# Altium PCB MotherBoard.PcbDoc
Units mm, origin at the board's own origin, x right, y up, seen from the top; angles counter-clockwise.
Board outline 127 x 101.6 mm, 2 copper layers (Top Layer, Bottom Layer); 102 components, 87 nets, 443 pads, 116 vias.
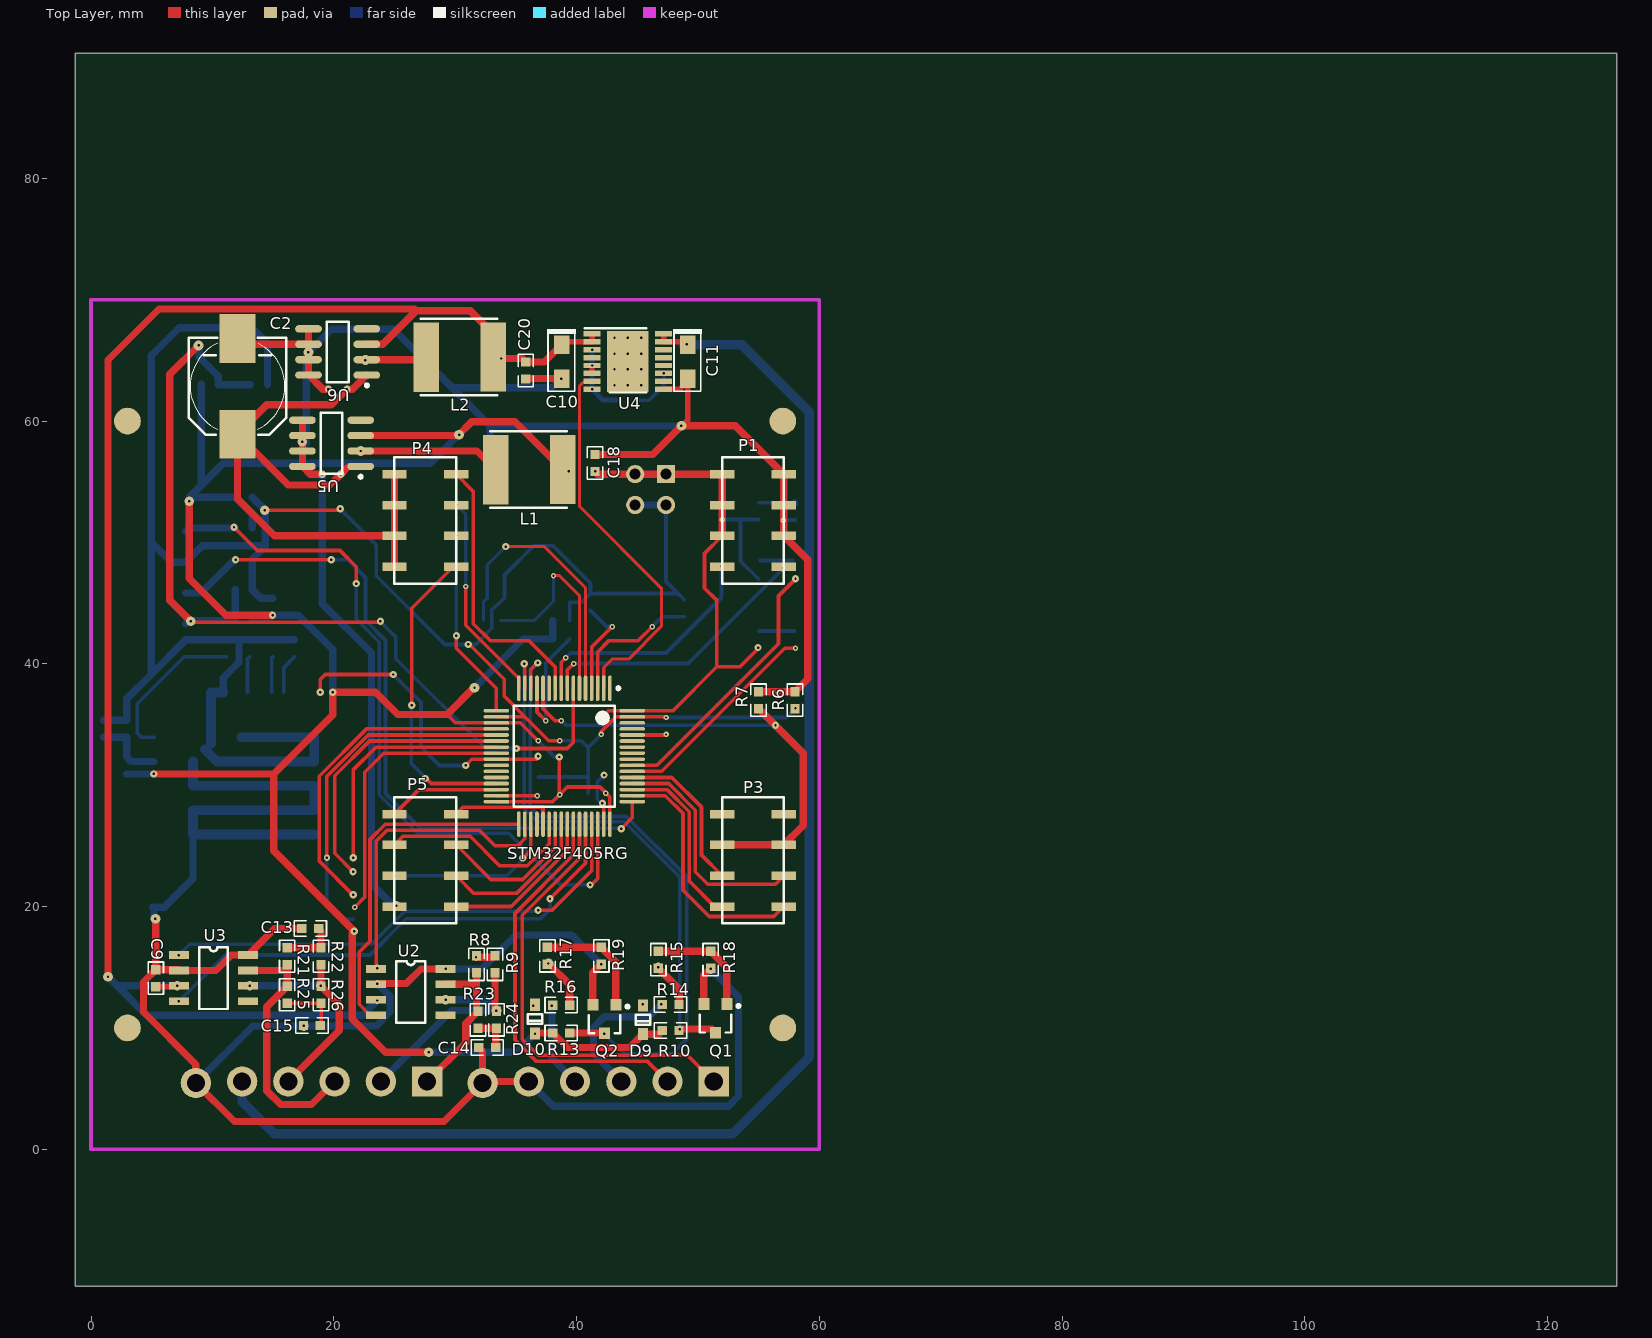
[diagram p0: Top Layer view]
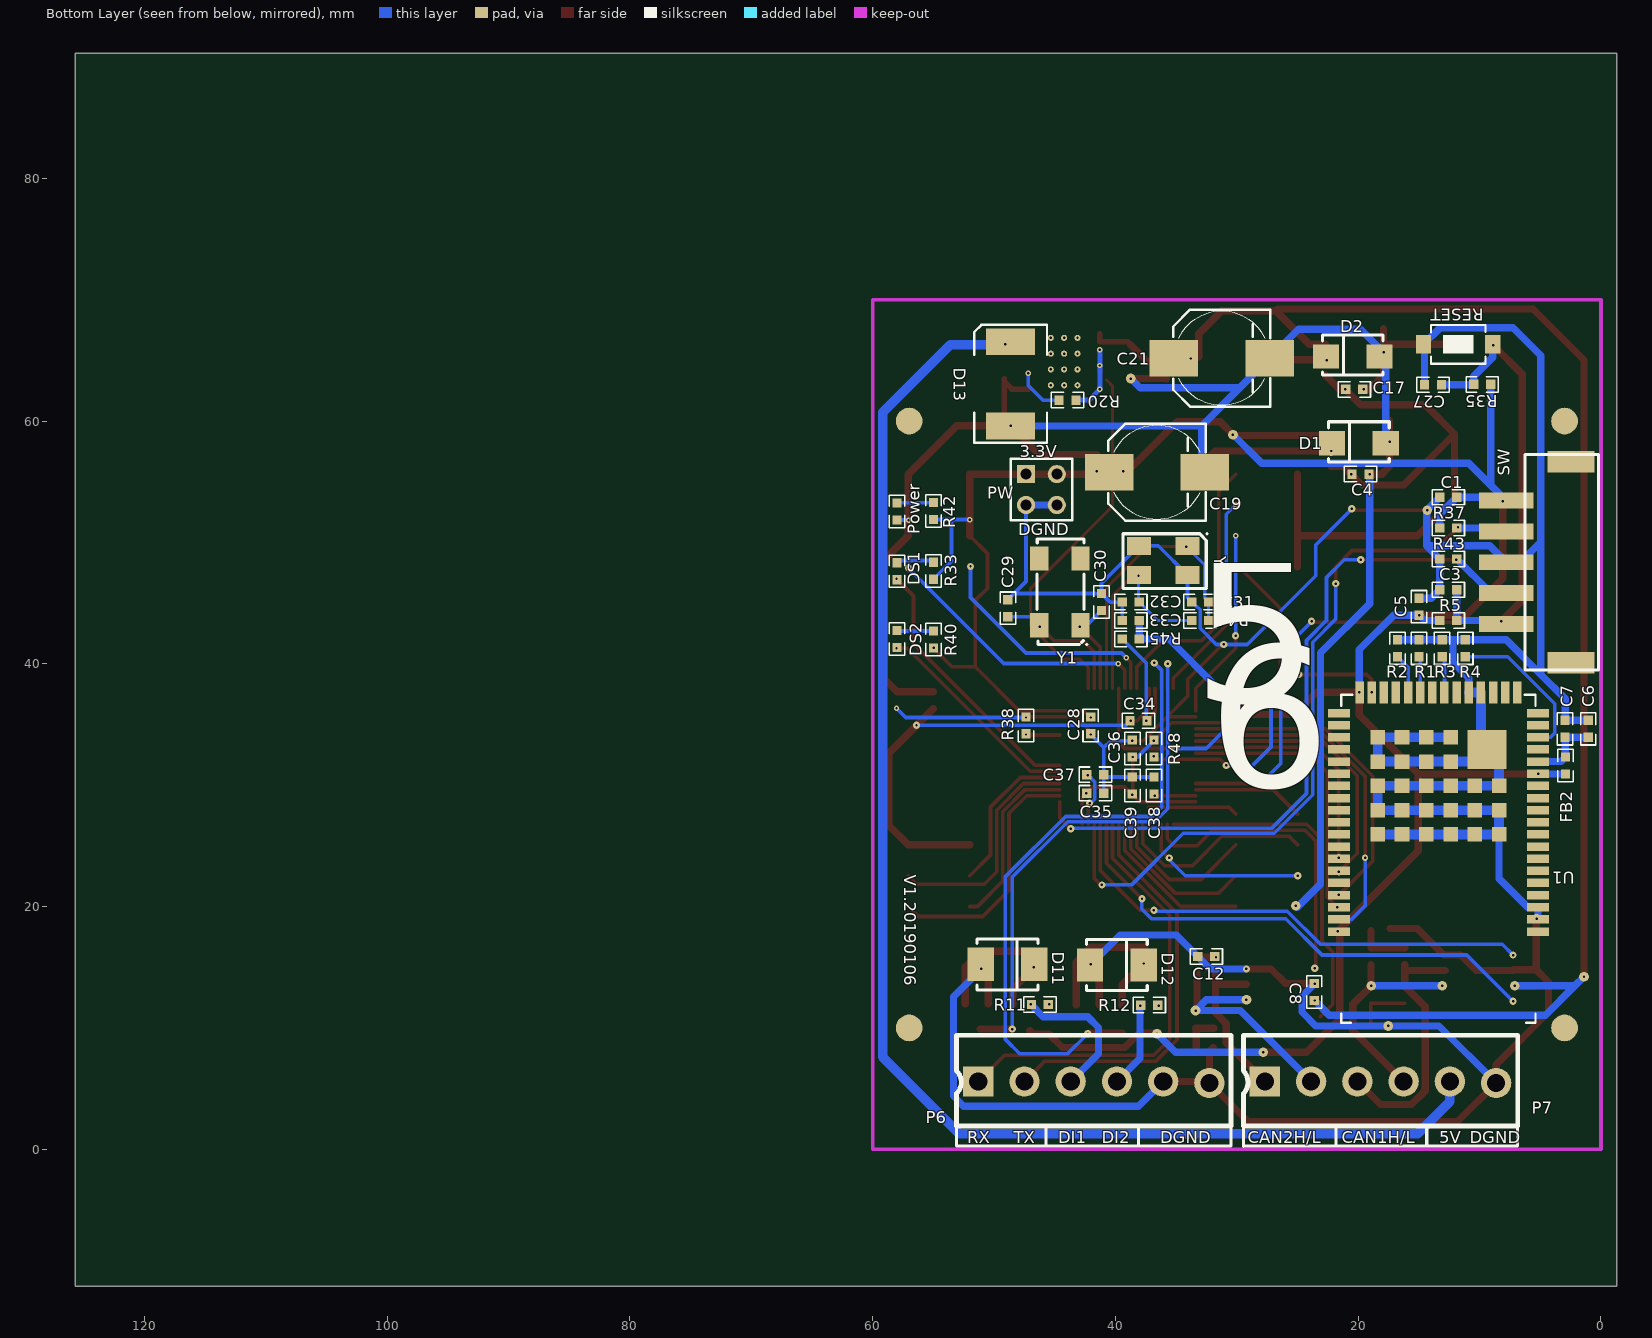
[diagram p1: Bottom Layer view, seen from below]
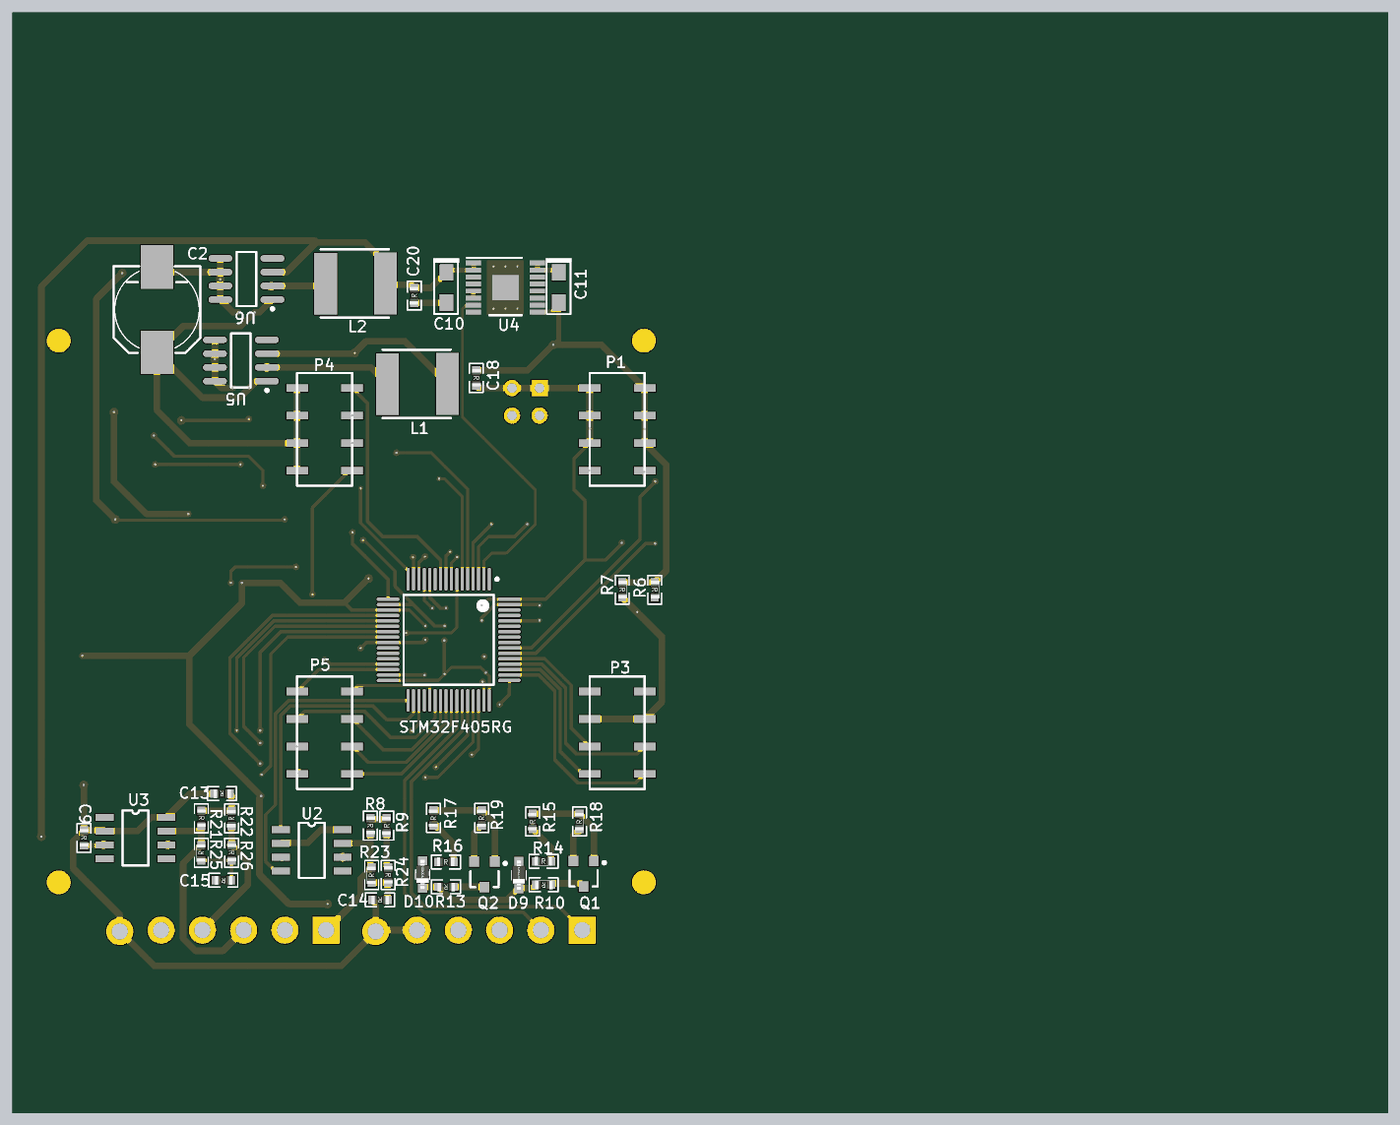
[diagram p2: 3D render of the assembled board from above, using the file's embedded part models]
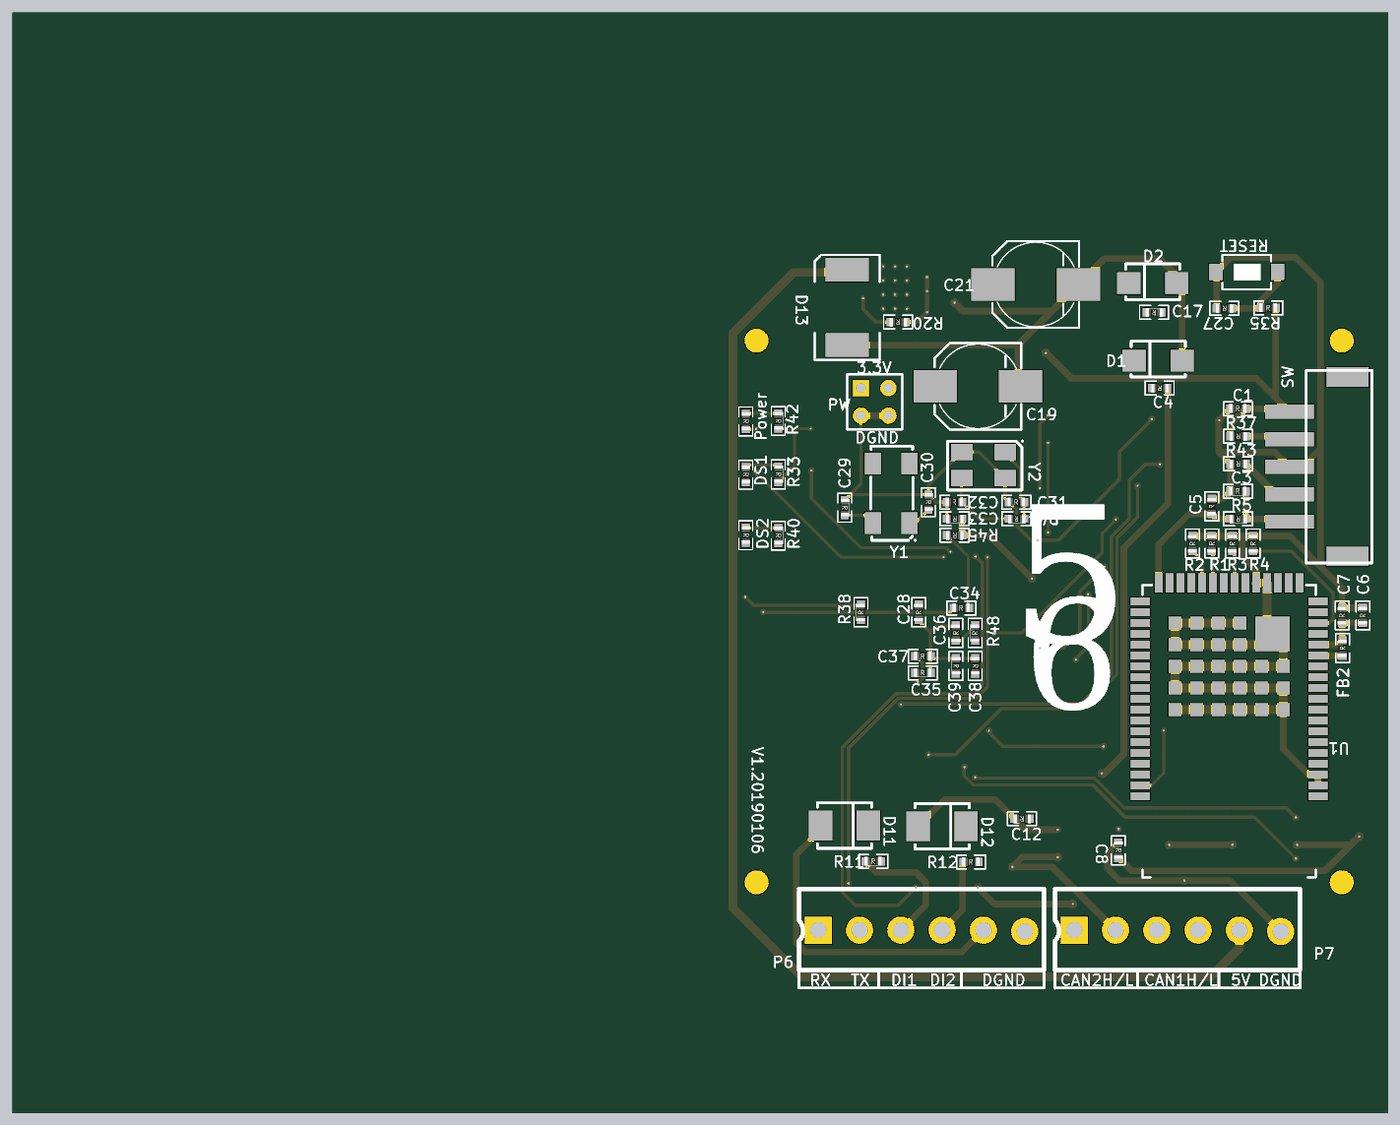
[diagram p3: 3D render of the assembled board from below, using the file's embedded part models]

## Layer stack, top to bottom
Top Layer: signal copper 0.0356
Dielectric: core 0.32, FR-4, Dk 4.8
Bottom Layer: signal copper 0.0356

## Board outline
-1.3,-11.3 125.7,-11.3 125.7,90.3 -1.3,90.3

## Design rules (kind name [scope] priority, off if disabled: settings)
Clearance [All] p1: gap=0.127
HoleSize [All] p1: absolutevalues=TRUE maxlimit=3 minlimit=0.2 maxpercent=80.000 minpercent=20.000
MinimumSolderMaskSliver [All] p1: minsoldermaskwidth=0
PolygonConnect [All] p1: connectstyle=Relief reliefconductorwidth=0.254 reliefentries=4 polygonreliefangle="90 Angle" airgapwidth=0.254
RoutingVias [All] p1: holewidth=0.254 width=0.6 viastyle="Through Hole" minholewidth=0.2 minwidth=0.45 maxholewidth=0.711 maxwidth=6
SilkToSilkClearance [All] p1: silktosilkclearance=0
SilkToSolderMaskClearance [IsPad] p1: minsilkscreentomaskgap=0 clearancetoexposedcopper=TRUE
SolderMaskExpansion [All] p1: expansion=0.102
Width GND [(InNet('AGND') OR InNet('DGND') OR InNet('GND'))] p1: maxlimit=0.8 minlimit=0.254 preferedwidth=0.6
Width PWR [(InNet('3V3_LM2596OUT') OR InNet('5V_LM2596OUT') OR InNet('5V_OUT') OR InNet('ANA33') OR InNet('VCC3V3') OR InNet('VCC5V') OR InNet('VDDA') OR InNet('VIN'))] p2: maxlimit=0.8 minlimit=0.254 preferedwidth=0.5
Width [All] p3: maxlimit=0.8 minlimit=0.254 preferedwidth=0.3
24 further rules are at their usual default settings.

## Classes and differential pairs
component class WIFI-79: C5 C6 C7 D9 D10 D11 D12 FB2 P6 P7 Q1 Q2 R1 R2 R3 R4 R10 R11 R12 R13 R14 R15 R16 R17 R18 R19 U1
component class rock: C1 C2 C3 C4 C8 C9 C10 C11 C12 C13 C14 C15 C17 C18 C19 C20 C21 C27 C28 C29 C30 C31 C32 C33 C34 C35 C36 C37 C38 C39 D1 D2 D13 DS1 DS2 L1 L2 P1 P3 P4 P5 Power PW R5 R6 R7 R8 R9 R20 R21 R22 R23 R24 R25 R26 R33 R35 R37 R38 R40 R42 R43 R44 R45 R48 RESET STM32F405RG SW U2 U3 U4 U5 U6 Y1 Y2

## Components (designator, comment, footprint, x,y, rotation, side; value= is the part's Value field where it differs from the comment)
C1 "0.1uF" 0603 12.573,53.721 r180 bottom
C2 "220uF/35V" C-RB-S8 12.065,62.865 r90 top
C3 "0.1uF" 0603 12.573,46.101 r180 bottom
C4 "0.1uF" 0603 19.812,55.626 r0 bottom
C5 "0.1uF" 0603 14.986,44.704 r90 bottom
C6 "2.2uF" 0603 1.046,34.641 r90 bottom
C7 "0.1uF" 0603 2.951,34.641 r90 bottom
C8 "0.1uF" 0603 23.622,12.954 r270 bottom
C9 "0.1uF" 0603 5.334,14.097 r270 top
C10 "Cap Pol3" CAP-3216 38.765,64.9 r270 top
C11 "Cap Pol3" CAP-3216 49.149,64.897 r270 top
C12 "47nF" 0603 32.512,15.875 r0 bottom
C13 "47nF" 0603 18.064,18.191 r180 top
C14 "47nF" 0603 32.639,8.382 r180 top
C15 "47nF" 0603 18.191,10.19 r180 top
C17 "0.1uF" 0603 20.32,62.611 r0 bottom
C18 "0.1uF" 0603 41.529,56.548 r270 top
C19 "220uF/35V" C-RB-S8 36.576,55.786 r180 bottom
C20 "0.1uF" 0603 35.814,64.168 r90 top
C21 "220uF/35V" C-RB-S8 31.242,65.184 r180 bottom
C27 "0.1uF" 0603 13.843,62.992 r0 bottom
C28 "0.1uF" 0603 42.037,34.925 r90 bottom
C29 "6pF" 0603 48.865,44.58 r270 bottom
C30 "6pF" 0603 41.148,45.085 r270 bottom
C31 "10pF" 0603 33.02,45.085 r180 bottom
C32 "10pF" 0603 38.735,45.085 r180 bottom
C33 "104" 0603 38.735,43.561 r0 bottom
C34 "104" 0603 38.1,35.306 r180 bottom
C35 "0.1uF" 0603 41.656,29.337 r180 bottom
C36 "104" 0603 38.608,33.02 r90 bottom
C37 "2.2uF" 0603 41.656,30.861 r180 bottom
C38 "2.2uF" 0603 36.83,29.972 r270 bottom
C39 "104" 0603 38.608,29.972 r270 bottom
D1 "B340A" DO-214AC 17.653,58.293 r180 bottom
D2 "B340A" DO-214AC 18.161,65.438 r180 bottom
D9 "LRB551V-30T1G" SOD-323 45.466,10.668 r90 top
D10 "LRB551V-30T1G" SOD-323 36.576,10.731 r90 top
D11 "SMBJ 6.5CA" DO-214AA 51.181,15.113 r0 bottom
D12 "SMBJ 6.5CA" DO-214AA 42.164,15.05 r0 bottom
D13 "SMDJ 5CA" SMC 48.641,63.119 r90 bottom
DS1 "LED1" 0603 58,47.625 r270 bottom
DS2 "LED2" 0603 58,42.037 r270 bottom
FB2 "BLM15EG121SN1D" 0603 2.921,31.623 r90 bottom
L1 "SWPA6045S680MT" 6045 35.941,56.167 r0 top
L2 "SWPA6045S680MT" 6045 30.226,65.438 r0 top
P1 "Header 4X2" HDR4X2_A_TIEPIAN 52,48 r0 top
P3 "Header 4X2" HDR4X2_A_TIEPIAN 52,20 r0 top
P4 "Header 4X2" HDR4X2_A_TIEPIAN 25,48 r0 top
P5 "Header 4X2" HDR4X2_A_TIEPIAN 25,20 r0 top
P6 "Header 6" P6 51.308,5.588 r90 bottom
P7 "Header 6" P6 27.686,5.588 r90 bottom
Power "LED3" 0603 58,52.54 r270 bottom
PW "Header 2X2A" HDR2X2_A 47.371,55.626 r180 bottom
Q1 "MMBT9013H" SOT-23 51.435,10.795 r180 top
Q2 "MMBT9013H" SOT-23 42.291,10.731 r180 top
R1 "4.7K" 0603 14.986,41.275 r90 bottom
R2 "4.7K" 0603 16.764,41.275 r90 bottom
R3 "4.7K" 0603 13.081,41.275 r90 bottom
R4 "4.7K" 0603 11.176,41.275 r90 bottom
R5 "10k" 0603 12.573,43.561 r0 bottom
R6 "0R" 0603 58,37 r270 top
R7 "0R" 0603 55,37 r270 top
R8 "120R" 0603 31.75,15.24 r270 top
R9 "120R" 0603 33.274,15.24 r90 top
R10 "1K" 0603 47.752,9.779 r180 top
R11 "1K" 0603 46.228,11.938 r180 bottom
R12 "1K" 0603 37.211,11.874 r180 bottom
R13 "1K" 0603 38.735,9.588 r180 top
R14 "1K" 0603 47.752,11.938 r0 top
R15 "1K" 0603 46.736,15.621 r90 top
R16 "1K" 0603 38.735,11.874 r0 top
R17 "1K" 0603 37.592,15.938 r90 top
R18 "10K" 0603 51.054,15.621 r90 top
R19 "10K" 0603 42.037,15.938 r90 top
R20 "12K" 0603 43.942,61.722 r0 bottom
R21 "120R" 0603 16.159,15.905 r270 top
R22 "120R" 0603 18.953,15.905 r90 top
R23 "120R" 0603 31.877,10.668 r90 top
R24 "120R" 0603 33.401,10.668 r270 top
R25 "120R" 0603 16.159,12.73 r90 top
R26 "120R" 0603 18.953,12.73 r270 top
R33 "1K" 0603 55,47.658 r270 bottom
R35 "10K" 0603 9.779,63.025 r180 bottom
R37 "10k" 0603 12.573,51.181 r0 bottom
R38 "10K" 0603 47.371,34.925 r90 bottom
R40 "1K" 0603 55,42 r270 bottom
R42 "1K" 0603 55,52.582 r270 bottom
R43 "10k" 0603 12.573,48.641 r0 bottom
R44 "10M" 0603 33.02,43.561 r0 bottom
R45 "10R" 0603 38.735,42.037 r0 bottom
R48 "10K" 0603 36.83,33.02 r90 bottom
RESET "SW-PB" SW_PB2_A2 11.811,66.327 r270 bottom
STM32F405RG "STM" LQFP-64 38.989,32.385 r270 top
SW "SW" "HDR5X1_SW _Tiepian" 3.175,48.387 r270 bottom
U1 "RS9113-79" RS9113-79 21.59,35.941 r0 bottom
U2 "TJA1051T/3" SOP-8 23.495,14.859 r0 top
U3 "TJA1051T/3" SOP-8 7.239,16.002 r0 top
U4 "TPS26600PWPT" PWP0016H_N 44.226,64.9 r0 top
U5 "XL1509-3.3E1" SOIC8_N 19.812,58.166 r180 top
U6 "XL1509-5.0E1" SOIC8_N 20.32,65.692 r180 top
Y1 "MC306" XTAL_8x3.8 44.577,45.974 r270 bottom
Y2 "ABM3B-8.000MHZ-10-1-U-T" XTAL_5x3.2 36.068,48.514 r180 bottom

## Footprints (in the part's own frame and the unit in brackets; to place one, negate y for a bottom-side part, rotate by r counter-clockwise, add the part's x,y. Pads: shape width x height; smd on the part's side, far side on the other; paste and mask are expansions set on the pad)
0603 [mil]
  rect 30x30 smd: 1(-27.5,0) 2(27.5,0)
  silkscreen extent -52,-25 52,25, body extent -32,-15 31,17, height 21
6045 [mm] "功率电感"
  rect 2.1x5.7 smd: 1(2.92,-0.159) 2(-2.592,-0.185)
  silkscreen extent -3.05,-3.31 3.25,2.99
C-RB-S8 [mm] "贴片电解"
  rect 4x3 smd: 1(-3.937,0) 2(3.937,0)
  silkscreen extent -4,-4 4,4, body extent -3.94,-3.94 3.94,3.94, height 10.9
CAP-3216 [mil] "钽电容"
  rect 60x50 smd: 1(-55,0) 2(55,0)
  silkscreen extent -106,-48 96,46
DO-214AA [mil]
  rect 85x107.99 smd: 1(-2.99,-5) 2(-177.01,-5)
  silkscreen extent -188,-88 8,78
DO-214AC [mil]
  rect 85x78.74 smd: 1(-2.99,-5) 2(-177.01,-5)
  silkscreen extent -188,-65 8,65
HDR2X2_A [mm] "Connector; Header; 2 Position"
  rect 1.5x1.5 hole 0.9: 1(0,0)
  round 1.5 hole 0.9: 2(2.54,0) 3(2.54,-2.54) 4(0,-2.54)
  silkscreen extent -1.27,-3.81 3.81,1.27
HDR4X2_A_TIEPIAN [mm] "贴片排插排母"
  rect 2x0.7 smd: 1(0,7.62) 2(5.08,7.62) 3(0,5.08) 4(5.08,5.08) 5(0,2.54) 6(5.08,2.54) 7(0,0) 8(5.08,0)
  silkscreen extent 0,-1.39 5.08,9.02
"HDR5X1_SW _Tiepian" [mm] "贴片SW下载器"
  rect 1.3x4.5 smd: 1(5.1,-4.636) 2(2.56,-4.636) 3(0.02,-4.636) 4(-2.52,-4.636) 5(-5.06,-4.636)
  rect 1.8x3.9 smd: 6(-8.26,0.714) 7(8.299,0.714)
  silkscreen extent -8.87,-3.1 8.91,2.96
LQFP-64 [mm] "LQFP64"
  oval 2.1x0.3 smd: 1(-5.6,3.75) 2(-5.6,3.25) 3(-5.6,2.75) 4(-5.6,2.25) 5(-5.6,1.75) 6(-5.6,1.25) 7(-5.6,0.75) 8(-5.6,0.25) 9(-5.6,-0.25) 10(-5.6,-0.75) 11(-5.6,-1.25) 12(-5.6,-1.75) 13(-5.6,-2.25) 14(-5.6,-2.75) 15(-5.6,-3.25) 16(-5.6,-3.75) 33(5.6,-3.75) 34(5.6,-3.25) 35(5.6,-2.75) 36(5.6,-2.25) 37(5.6,-1.75) 38(5.6,-1.25) 39(5.6,-0.75) 40(5.6,-0.25) 41(5.6,0.25) 42(5.6,0.75) 43(5.6,1.25) 44(5.6,1.75) 45(5.6,2.25) 46(5.6,2.75) 47(5.6,3.25) 48(5.6,3.75)
  oval 0.3x2.1 smd: 17(-3.75,-5.6) 18(-3.25,-5.6) 19(-2.75,-5.6) 20(-2.25,-5.6) 21(-1.75,-5.6) 22(-1.25,-5.6) 23(-0.75,-5.6) 24(-0.25,-5.6) 25(0.25,-5.6) 26(0.75,-5.6) 27(1.25,-5.6) 28(1.75,-5.6) 29(2.25,-5.6) 30(2.75,-5.6) 31(3.25,-5.6) 32(3.75,-5.6) 49(3.75,5.6) 50(3.25,5.6) 51(2.75,5.6) 52(2.25,5.6) 53(1.75,5.6) 54(1.25,5.6) 55(0.75,5.6) 56(0.25,5.6) 57(-0.25,5.6) 58(-0.75,5.6) 59(-1.25,5.6) 60(-1.75,5.6) 61(-2.25,5.6) 62(-2.75,5.6) 63(-3.25,5.6) 64(-3.75,5.6)
  silkscreen extent -5.72,-4.15 4.15,4.58, body extent -5,-5 5,5, height 1.6
P6 [mm]
  rect 2.5x2.5 hole 1.5: 1(0,0)
  round 2.5 hole 1.5: 2(0,-3.81) 3(0,-7.62) 4(0,-11.43) 5(0,-15.24) 6(-0.127,-19.05)
  silkscreen extent -3.68,-20.83 3.81,1.78
PWP0016H_N [mm]
  rect 1.4x0.45 smd paste+0 mask+0.051: 1(-2.95,2.275) 2(-2.95,1.625) 3(-2.95,0.975) 4(-2.95,0.325) 5(-2.95,-0.325) 6(-2.95,-0.975) 7(-2.95,-1.625) 8(-2.95,-2.275) 9(2.95,-2.275) 10(2.95,-1.625) 11(2.95,-0.975) 12(2.95,-0.325) 13(2.95,0.325) 14(2.95,0.975) 15(2.95,1.625) 16(2.95,2.275)
  rect 3.4x5 smd paste-2.487 mask-2.489: 17(0,0)
  round 0.5 / inner round 1.524 / far side round 0.5 hole 0.203 mask-0.241: V(-1.1,-1.95) V(-1.1,1.95) V(0,-1.95) V(0,-0.65) V(0,0.65) V(0,1.95) V(1.1,-1.95) V(1.1,1.95)
  round 0.5 / inner round 1.524 / far side round 0.5 hole 0.203 mask-0.152: V(-1.1,-0.65) V(-1.1,0.65) V(1.1,-0.65) V(1.1,0.65)
  silkscreen extent -3.55,-2.55 1.5,2.75, body extent 0,0 0.25,0.25, height 0.25
RS9113-79 [mm]
  rect 1.8x0.7 smd: 1(0,0) 2(0,1) 3(0,2) 4(0,3) 5(0,4) 6(0,5) 7(0,6) 8(0,7) 9(0,8) 10(0,9) 11(0,10) 12(0,11) 13(0,12) 14(0,13) 15(0,14) 16(0,15) 17(0,16) 18(0,17) 19(0,18) 20(-16.4,18) 21(-16.4,17) 22(-16.4,16) 23(-16.4,15) 24(-16.4,14) 25(-16.4,13) 26(-16.4,12) 27(-16.4,11) 28(-16.4,10) 29(-16.4,9) 30(-16.4,8) 31(-16.4,7) 32(-16.4,6) 33(-16.4,5) 34(-16.4,4) 35(-16.4,3) 36(-16.4,2) 37(-16.4,1) 38(-16.4,0)
  rect 0.7x1.8 smd: 39(-14.7,-1.7) 40(-13.7,-1.7) 41(-12.7,-1.7) 42(-11.7,-1.7) 43(-10.7,-1.7) 44(-9.7,-1.7) 45(-8.7,-1.7) 46(-7.7,-1.7) 47(-6.7,-1.7) 48(-5.7,-1.7) 49(-4.7,-1.7) 50(-3.7,-1.7) 51(-2.7,-1.7) 52(-1.7,-1.7)
  rect 3.2x3.2 smd: 53(-12.2,3)
  rect 1.2x1.2 smd: 54(-9.2,2) 55(-7.2,2) 56(-5.2,2) 57(-3.2,2) 58(-9.2,4) 59(-7.2,4) 60(-5.2,4) 61(-3.2,4) 62(-13.2,6) 63(-11.2,6) 64(-9.2,6) 65(-7.2,6) 66(-5.2,6) 67(-3.2,6) 68(-13.2,8) 69(-11.2,8) 70(-9.2,8) 71(-7.2,8) 72(-5.2,8) 73(-3.2,8) 74(-13.2,10) 75(-11.2,10) 76(-9.2,10) 77(-7.2,10) 78(-5.2,10) 79(-3.2,10)
  silkscreen extent -16.2,-1.5 -0.2,25.5
SMC [mm] "TVS管"
  rect 2.2x4 smd: 1(-3.524,0.005) 2(3.426,0.005)
  silkscreen extent -4.9,-3 4.8,3
SOD-323 [mm]
  rect 1x0.83 smd: 1(1.18,0) 2(-1.18,0)
  silkscreen extent -0.4,-0.6 0.4,0.6, body extent -1.35,-0.62 1.35,0.63, height 1.1
SOIC8_N [mm] "8-Pin Small Outline Integrated Circuit Package (SOIC8), IPC Medium Density"
  oval 2.2x0.6 smd: 1(-2.4,1.905) 2(-2.4,0.635) 3(-2.4,-0.635) 4(-2.4,-1.905) 5(2.4,-1.905) 6(2.4,-0.635) 7(2.4,0.635) 8(2.4,1.905)
  silkscreen extent -2.53,-2.5 0.9,2.88, body extent -1.95,-2.45 1.95,2.45, height 1.75
SOP-8 [mil]
  rect 65x25 smd: 1(0,0) 2(0,-50) 3(0,-100) 4(0,-150) 5(224.41,-150) 6(224.41,-100) 7(224.41,-50) 8(224.41,0)
  silkscreen extent 65,-175 159,25
SOT-23 [mm]
  rect 0.9x0.95 smd: 1(-0.95,-1.175) 2(0.95,-1.175) 3(0,1.175)
  silkscreen extent -2.03,-1.14 1.3,1.18
SW_PB2_A2 [mm] "3*4mm"
  rect 1.5x1.25 smd: 1(0,2.9) 2(0,-2.8)
  silkscreen extent -1.6,-2.2 1.6,2.3, body extent -0.76,-1.14 0.76,1.27, height 1.2
XTAL_5x3.2 [mm] "晶振ABM3B-8.000MHZ-10-1-U-T"
  rect 2x1.5 smd: 1(2,1.2) 2(-2,1.2) 3(-2,-1.2) 4(2,-1.2)
  silkscreen extent -3.3,-2.3 3.6,2.23
XTAL_8x3.8 [mm] "四脚晶振"
  rect 2x1.5 smd: 1(2.8,1.7) 2(-2.7,1.7) 3(-2.7,-1.7) 4(2.8,-1.7)
  silkscreen extent -4.3,-1.9 4.4,2.23

## Part data
C1 C3 C4 C5 C6 C7 C8 C9 C12 C13 C14 C15 C17 C18 C20 C27 C28 C29 C30 C31 C32 C33 C34 C35 C36 C37 C38 C39: library part C
C2 C19 C21: library part CAP
C10 C11: "Polarized Capacitor (Surface Mount)"
D1 D2: library part SMBJ, "TVS"
D9 D10: library part "D_DIODE LRB"
D11 D12: "TVS,SMBJ 6.5CA,600W SMD Transient Voltage Suppressor Diodes,"
D13: library part "SMBJ 6.5CA", "SMDJ5.0CA"
DS1 Power: library part LED2, "Typical RED, GREEN, YELLOW, AMBER GaAs LED"
DS2: "Typical RED, GREEN, YELLOW, AMBER GaAs LED"
FB2: library part "Res Semi", "FILTER CHIP 120 OHM 1.5A 0402"
L1 L2: library part Inductor, "电感"
P1 P3 P4 P5 P6 P7 PW: "接插件"
Q1 Q2: library part L2SC4617RT1G
R1 R2 R3 R4 R5 R8 R9 R20 R21 R22 R23 R24 R25 R26 R33 R37 R38 R40 R42 R43 R44 R45 R48: library part R
R6 R7 R10 R11 R12 R13 R14 R15 R16 R17 R18 R19: library part R_1K, "Res,1K,0603"
R35: library part Res1, "贴片电阻"
RESET: "微动开关"
STM32F405RG: library part STM32F405RG, "STM32F405RG_64Pins"
SW: library part "Header 5", "XH插座 1*5P 2.54mm"
U2 U3: library part SN65HVD230D
U4: library part TPS26600PWPR
U5 U6: library part XL1509-3.3V/5V/12V
Y1: library part XTAL_8x3.8, "Q13MC3062000600"
Y2: library part XTAL_8x3.8, "ABM3B-8.000MHZ/10pF"

## Free pads (board coordinates)
  round 2.2 all layers, no hole: 0(3,10) 0(3,60) 0(57,10) 0(57,60)

## Via types
v1: diameter 0.6, hole 0.2, Top Layer to Bottom Layer, tented both sides, 57 vias
v2: diameter 0.8, hole 0.2, Top Layer to Bottom Layer, tented both sides, 29 vias
v3: diameter 0.45, hole 0.2, Top Layer to Bottom Layer, tented both sides, 29 vias
v4: diameter 0.5, hole 0.2, Top Layer to Bottom Layer, tented both sides, 1 vias

## Nets (pads, with @x,y where several pads share a name; then routed paths per layer and width w, separated by ;. In a path a pad name is that pad's centre, name@x,y a point inside that pad or via, vN(x,y) a via of type N, cw(c..) or ccw(c..) an arc to the next point about the centre after c; other vN are vias at no path point)
3V3_LM2596OUT: D1.2 L1.2 U5.2 | length 11.8
  Top Layer w0.6: v2(22.212,57.531) 31.8,57.531 L1.2
5V_LM2596OUT: D2.2 L2.2 U6.2 | length 5
  Top Layer w0.6: U6.2 27.438,65.057 L2.2
  other v2: 22.606,65.024
5V_OUT: C11.1 D13.2 P7.5 U4.15 U4.16 | length 120.7
  Top Layer w0.45: U4.16 U4.15 48.918,66.525 C11.1
  Bottom Layer w0.8: P7.5 12.446,3.937 15.113,1.27 52.832,1.27 59.182,7.62 59.182,60.706 53.594,66.294 D13.2@48.768,66.294
  other v3: 49.064,66.33
5V_OUT_SD: STM32F405RG.2 U4.7 | length 31.1
  Top Layer w0.254: U4.7@40.737,63.376 40.259,62.898 40.259,52.959 46.99,46.228 46.99,43.086 44.29,40.386 42.926,40.386 42.239,39.699 STM32F405RG.2
ADC_BUSY: P4.4 STM32F405RG.16 | length 17.2
  Top Layer w0.3: v3@30.861,46.355 30.861,43.18 35.239,38.802 STM32F405RG.16
  Bottom Layer w0.3: v3@30.093,53.092 30.862,52.323 v3(30.862,46.369)
  other v3: 30.1,53.1
ADC_CONV: P5.3 STM32F405RG.38 | length 16.4
  Top Layer w0.3: P5.3 25.701,25.781 31.242,25.781 33.655,23.368 35.941,23.368 37.739,25.166 STM32F405RG.38
ADC_CS: P4.6 STM32F405RG.17 | length 15.8
  Top Layer w0.3: v1@30.099,42.291 30.099,41.275 33.389,37.985 STM32F405RG.17
  Bottom Layer w0.3: v1(30.1,42.305) 30.1,50.545 v3@30.099,50.546
  other v3: 30.1,50.56
ADC_RAGE: P5.2 STM32F405RG.37 | length 8.8
  Top Layer w0.3: P5.2 30.626,28.166 37.239,28.166 STM32F405RG.37
ADC_RST: P5.1 STM32F405RG.30 | length 9.2
  Top Layer w0.3: P5.1 27.015,29.635 STM32F405RG.30
AGND: C34.1 P3.3 P3.4 R7.2 STM32F405RG.12 | length 39.9
  Top Layer w0.3: STM32F405RG.12 37.239,36.294 38.227,35.306 v3@38.735,35.306
  Top Layer w0.6: P3.3 P3.4 58.674,26.674 58.674,32.627 R7.2
  Bottom Layer w0.3: v3(38.736,35.32) 39.131,34.925 v1@56.388,34.925
  other v1: 56.389,34.939
ANA33: C6.1 C7.1 FB2.2 U1.34 | length 6
  Bottom Layer w0.3: FB2.2 FB2.2@2.951,32.351
  Bottom Layer w0.6: C6.1 C7.1 FB2.2@2.951,32.351 ; FB2.2 3.301,31.941 U1.34
BOOT1: STM32F405RG.28
CAN1_H: P7.3 R21.2 R25.2 U3.7 | length 21.3
  Top Layer w0.6: U3.7@12.827,14.732 16.159,14.732 ; R21.2 R25.2 14.478,11.747 14.478,4.826 15.621,3.683 18.161,3.683 P7.3
CAN1_L: P7.4 R22.1 R26.1 U3.6 | length 18
  Top Layer w0.6: U3.6 v2(13.081,13.462) ; P7.4 20.447,9.779 20.447,11.938 R26.1@18.953,13.432 ; v2(18.923,13.462) R26.1@18.953,13.432 ; R22.1 R26.1@18.953,13.432
  Bottom Layer w0.6: v2(13.081,13.462) v2(18.923,13.462)
CAN1_RX: STM32F405RG.44 U3.4 | length 41.9
  Top Layer w0.3: v1(37.812,20.638) 40.739,23.564 STM32F405RG.44
  Bottom Layer w0.3: v1(7.239,12.192) 11.049,16.002 22.987,16.002 25.971,18.987 37.02,18.987 37.846,19.812 v1@37.846,20.574
CAN1_TX: STM32F405RG.45 U3.1 | length 40.5
  Top Layer w0.3: v1(36.83,19.685) 37.973,19.685 41.239,22.951 STM32F405RG.45
  Bottom Layer w0.3: v1(7.239,16.002) 8.128,16.891 23.114,16.891 25.845,19.622 v1@36.639,19.622
CAN2_H: P7.1 R8.2 R23.2 U2.7 | length 13.3
  Top Layer w0.6: P7.1 30.861,8.763 30.861,10.351 R23.2 31.75,11.493 31.75,13.589 ; U2.7 31.75,13.589 ; R8.2 31.75,13.589
CAN2_L: P7.2 R9.1 R24.1 U2.6 | length 19.7
  Top Layer w0.6: R9.1 33.274,11.493 R24.1
  Bottom Layer w0.6: P7.2 29.718,11.43 v2(33.401,11.43) 32.512,12.319 v2(29.21,12.319)
CAN2_RX: STM32F405RG.33 U2.4 | length 28.2
  Top Layer w0.3: U2.4@23.114,10.922 22.098,11.938 22.098,16.256 22.987,17.145 22.987,25.527 24.245,26.785 STM32F405RG.33
CAN2_TX: STM32F405RG.34 U2.1 | length 25.1
  Top Layer w0.3: U2.1 23.495,25.4 24.387,26.292 32.001,26.292 33.274,25.019 35.179,25.019 35.739,25.579 STM32F405RG.34
  other v1: 23.588,14.922
DGND: C1.1 C3.1 C5.2 C6.2 C7.2 C8.1 C9.1 C12.2 C13.2 C14.2 C15.2 C27.2 C28.1 C29.1 C30.1 C31.1 C32.1 C33.2 C35.2 C36.2 C37.2 C38.1 C39.1 D11.1 D12.1 P6.5 P6.6 P7.6 PW.3 PW.4 Q1.2 Q2.2 R1.2 R2.2 R3.2 R4.2 R6.2 R18.1 R19.1 R38.2 R43.2 RESET.2 STM32F405RG.18 STM32F405RG.63 SW.3 U1.21 U1.22 U1.42 U1.43 U1.53 U1.54 U1.55 U1.56 U1.57 U1.58 U1.59 U1.60 U1.61 U1.62 U1.63 U1.64 U1.65 U1.66 U1.67 U1.68 U1.69 U1.70 U1.71 U1.72 U1.73 U1.74 U1.75 U1.76 U1.77 U1.78 U1.79 U2.2 U2.8 U3.2 U3.8 Y2.2 Y2.4 | length 401.2
  Top Layer w0.3: v2(14.317,52.642) v1@20.413,52.642 ; v1@31.115,41.656 34.036,38.735 34.036,37.338 35.739,35.635 ; STM32F405RG.18 35.739,35.635 ; v3@38.608,33.655 37.719,33.655 35.739,35.635 ; v3@42.037,34.29 42.037,34.417 43.255,35.635 STM32F405RG.63 v3@47.446,35.635
  Top Layer w0.6: v2@5.334,19.05 C9.1 ; C13.2 15.128,18.191 U3.8 11.557,16.002 10.287,14.732 U3.2 7.175,14.795 C9.1 ; v1(23.588,13.652) 25.971,13.652 27.178,14.859 U2.8 ; C14.2 32.258,8.064 P6.6 ; P6.5 32.385,5.588 P6.6 ; Q2.2 41.341,14.544 v2(42.037,15.24) ; Q1.2 50.485,14.353 R18.1 ; C9.1 4.318,13.779 4.318,11.303 8.636,6.985 P7.6 11.811,2.286 29.083,2.286 P6.6
  Bottom Layer w0.3: U1.53 U1.53@9.89,33.441 ; v1@20.574,52.705 23.495,49.784 23.495,47.244 29.146,41.593 v1(31.081,41.593) 31.686,41.593 33.02,42.926 33.02,44.45 C31.1 34.068,45.434 Y2.4 36.468,49.714 Y2.2 41.148,46.634 C30.1 ; C38.1 C39.1 40.767,30.671 C37.2 ; v3(38.609,33.669) 40.385,33.669 40.957,33.096 ; C33.2 C32.1 40.45,45.085 C30.1 ; C35.2 C37.2 ; 41.653,45.784 C30.1 ; 41.656,45.786 48.357,45.786 ; v3(42.038,34.177) 40.957,33.096 ; v3(47.372,35.574) 57.278,35.574 v3(58.04,36.336) ; PW.4 47.371,46.772 48.357,45.786 ; C29.1 48.357,45.786 ; C37.2 40.957,33.096
  Bottom Layer w0.6: C6.2 C7.2 2.951,37.114 4.953,39.116 ; U1.22@5.08,19.939 6.042,19.939 8.39,22.287 U1.74 ; U1.21 U1.22 ; P7.6 13.335,10.16 v2(17.526,10.16) 23.495,10.16 24.638,11.303 24.638,12.605 23.591,13.652 v1(23.588,13.652) ; U1.43 10.89,38.83 12.192,40.132 12.192,41.974 ; C1.1 14.351,52.642 14.351,49.721 ; C27.2 14.541,66.258 RESET.2 13.247,67.691 7.239,67.691 4.953,65.405 4.953,50.038 ; C5.2 13.97,45.403 C3.1 R43.2 14.351,49.721 ; R2.2 R1.2 R3.2 12.192,41.974 ; v1(29.21,14.859) 32.194,14.859 C12.2 34.989,17.653 39.611,17.653 D12.1 ; P6.5 38.1,3.556 52.513,3.556 53.34,4.383 53.34,12.573 v2(51.054,14.859) ; PW.3 PW.4 ; 4.953,39.116 7.81,41.974 R4.2 12.192,41.974 ; 4.953,39.116 4.953,50.038 ; 4.953,50.038 6.624,48.367 SW.3 9.165,49.721 14.351,49.721
  Bottom Layer w0.8: U1.53@8.39,31.941 U1.62 U1.63 U1.64 U1.65 U1.66 U1.67 U1.73 U1.72 U1.71 U1.70 U1.69 U1.68 U1.74 U1.75 U1.76 U1.77 U1.78 U1.79 ; U1.53 10.39,31.941 U1.58 U1.59 U1.60 U1.61 U1.57 U1.56 U1.55 U1.54 ; U1.53@9.89,33.441 U1.42 U1.43
  other v1: 20.54,52.769
  other v2: 5.3,18.987
DIGITAL_INPUT1: Q1.3 R10.1 STM32F405RG.15 | length 44.2
  Top Layer w0.3: STM32F405RG.15 v1@35.739,39.953
  Top Layer w0.6: v1(48.514,9.906) Q1.3@51.149,9.906
  Bottom Layer w0.3: v1(35.687,40.005) 35.687,28.067 36.761,26.993 43.927,26.993 48.514,22.406 v1(48.514,9.906)
DIGITAL_INPUT2: Q2.3 R13.1 STM32F405RG.14 | length 54
  Top Layer w0.3: STM32F405RG.14 36.239,39.541 v1@36.83,40.132 ; Q2.3@42.227,9.588 v1(42.291,9.525)
  Top Layer w0.6: R13.1 Q2.3@42.227,9.588
  Bottom Layer w0.3: v1(36.796,40.069) 36.172,39.444 36.172,28.217 36.969,27.42 44.104,27.42 49.091,22.433 49.091,9.086 47.879,7.874 43.942,7.874 v1(42.291,9.525)
DIO1: P6.3 R11.1 R14.1 | length 11.8
  Bottom Layer w0.6: P6.3 41.402,7.874 41.402,10.033 42.291,10.922 45.974,10.922 v1(46.99,11.938)
DIO2: P6.4 R12.1 R16.1 | length 7
  Bottom Layer w0.6: v1(37.973,11.811) 37.973,7.493 P6.4
EN1: P3.8 STM32F405RG.50 | length 20.7
  Top Layer w0.3: STM32F405RG.50 47.319,29.135 48.768,27.686 48.768,21.336 50.927,19.177 56.257,19.177 P3.8
EN2: P3.7 STM32F405RG.51 | length 14.7
  Top Layer w0.3: STM32F405RG.51 47.454,29.635 49.276,27.813 49.276,22.098 51.374,20 P3.7
EN3: P3.5 STM32F405RG.53 | length 13.1
  Top Layer w0.3: STM32F405RG.53 47.851,30.635 50.292,28.194 50.292,24.248 P3.5
EN4: P3.6 STM32F405RG.52 | length 19.2
  Top Layer w0.3: STM32F405RG.52 47.589,30.135 49.784,27.94 49.784,22.86 50.8,21.844 56.384,21.844 P3.6
GND: C2.2 C4.1 C10.2 C11.2 C17.1 C18.1 C19.2 C20.1 C21.2 D1.1 D2.1 D13.1 P1.2 P1.4 P1.6 P5.7 Power.2 R6.1 R7.1 U4.9 U5.5 U5.6 U5.7 U5.8 U6.5 U6.6 U6.7 U6.8 | length 161.7
  Top Layer w0.45: U4.9 48.528,62.625 C11.2@49.149,63.246 ; v2@48.641,59.563 48.7,59.622 49.149,60.071 C11.2@49.149,63.246 ; C11.2 C11.2@49.149,63.246
  Top Layer w0.6: C2.2 12.54,66.327 U6.6 ; U5.5 U5.6 U5.7 U5.8 18.047,55.626 v1(19.05,55.626) ; U6.5 U6.6 ; v1(19.558,62.611) 19.096,62.611 U6.8 U6.7 U6.6 ; C20.1 35.848,63.503 C10.2 ; C18.1 46.267,57.246 v2(48.642,59.622) 48.7,59.622 53.078,59.622 P1.2 P1.4 P1.6 59.055,48.565 59.055,38.753 R6.1 R7.1
  Bottom Layer w0.3: v3(57.048,51.841) Power.2
  Bottom Layer w0.6: D1.1 D2.1@17.729,65.311 ; v2(17.907,65.659) 19.812,67.564 24.925,67.564 C21.2 29.751,62.738 ; v1(19.05,55.626) 19.05,44.958 23.114,40.894 23.114,21.844 v2@25.019,19.939 ; C19.2 32.894,56.041 32.894,59.595 ; v2(38.735,63.5) 37.973,62.738 29.751,62.738 ; D13.1 32.894,59.595 ; 29.751,62.738 32.894,59.595
  other v2: 25.146,20.066 17.399,58.293
JTCK: R43.1 STM32F405RG.49 SW.2 | length 58.2
  Top Layer w0.3: v1(11.904,48.578) v1(19.778,48.578) ; v1(43.688,26.416) 44.577,27.305 44.577,27.877 44.589,27.889 STM32F405RG.49
  Bottom Layer w0.3: v1(19.778,48.578) 21.145,48.578 22.606,47.117 22.606,43.576 24.257,41.925 24.257,29.306 27.101,26.462 v1@43.642,26.462
  Bottom Layer w0.6: SW.2 9.06,45.827 R43.1
JTMS: R37.1 STM32F405RG.46 SW.4 | length 60.9
  Top Layer w0.3: v1(11.777,51.245) 13.682,49.34 20.511,49.34 21.844,48.006 v1(21.844,46.609) ; v1@41.148,21.717 41.739,22.308 STM32F405RG.46
  Bottom Layer w0.3: v1(21.844,46.609) 21.844,43.688 23.749,41.783 23.749,29.21 26.924,26.035 34.417,26.035 38.672,21.781 v1(41.114,21.781)
  Bottom Layer w0.6: SW.4 8.085,51.181 R37.1
JTRST: STM32F405RG.56
LED1: DS1.2 STM32F405RG.55 | length 22.1
  Top Layer w0.3: STM32F405RG.55 46.621,31.635 56.642,41.656 56.642,45.593 v1@58.039,46.99
  other v1: 58.04,47.004
LED2: DS2.2 STM32F405RG.54 | length 17.7
  Top Layer w0.3: STM32F405RG.54 47.01,31.135 57.15,41.275 v3(58.039,41.275)
LED3: P1.8 STM32F405RG.8 | length 23
  Top Layer w0.3: STM32F405RG.8 39.239,39.493 v3@39.751,40.005
  Bottom Layer w0.3: v3(39.752,40.019) 49.213,40.019 v1@57.056,47.861 ; v1@57.024,47.677 v1(57.024,47.893)
LED4: P1.7 STM32F405RG.9 | length 20.1
  Top Layer w0.3: STM32F405RG.9 38.739,40.001 38.735,40.005 38.735,40.132 v3(39.116,40.513)
  Bottom Layer w0.3: v3(39.116,40.513) 39.497,40.894 47.371,40.894 51.943,45.466 v1@51.943,48.006
  other v1: 51.944,48.02
NetC12_1: C12.1 R8.1 R9.2 | length 1.6
  Top Layer w0.3: R9.2@33.147,15.811 R9.2
  Top Layer w0.6: v1(31.716,15.811) R9.2@33.147,15.811
NetC13_1: C13.1 R21.1 R22.2 | length 4.2
  Top Layer w0.6: R21.1 R22.2 C13.1@18.953,18
NetC14_1: C14.1 R23.1 R24.2 | length 3.1
  Top Layer w0.6: R23.1 R24.2 33.337,9.906 C14.1
NetC15_1: C15.1 R25.1 R26.2 | length 4.7
  Top Layer w0.3: R25.1 R26.2 C15.1@18.953,10.253
  Top Layer w0.6: C15.1 C15.1@18.953,10.253
NetC37_1: C37.1 STM32F405RG.47 | length 4.5
  Top Layer w0.3: STM32F405RG.47 v1@42.239,28.523
  Bottom Layer w0.3: v1(42.13,28.512) 42.026,28.512 41.697,28.841 41.697,30.261 v1(42.269,30.833)
NetC38_2: C38.2 STM32F405RG.31 | length 3.4
  Top Layer w0.3: STM32F405RG.31 v3(36.755,29.135)
NetD9_1: D9.1 R11.2
  other v1: 45.466,11.938
NetD10_1: D10.1 R12.2
  other v1: 36.449,11.811
NetD11_2: D11.2 R14.2 R15.1 | length 3.7
  Top Layer w0.6: R15.1 48.45,13.208 R14.2
  other v2: 46.736,14.986
NetD12_2: D12.2 R16.2 R17.1 | length 4.2
  Top Layer w0.6: v2(37.685,15.303) 39.433,13.555 R16.2
NetDS1_1: DS1.1 R33.1 | length 2.7
  Bottom Layer w0.3: R33.1@55.157,48.514 DS1.1@57.81,48.514
NetDS2_1: DS2.1 R40.1 | length 3
  Bottom Layer w0.3: R40.1 DS2.1@57.963,42.698
NetPower_1: Power.1 R42.1 | length 3
  Bottom Layer w0.3: R42.1 Power.1@57.958,53.28
  Bottom Layer w0.6: Power.1@57.958,53.28 Power.1
NetQ1_1: Q1.1 R15.2 R18.2 | length 9.2
  Top Layer w0.6: R15.2 R18.2 52.385,14.988 Q1.1
NetQ2_1: Q2.1 R17.2 R19.2 | length 9.7
  Top Layer w0.6: R17.2 R19.2 43.241,15.433 Q2.1
NetR1_1: R1.1 U1.47 | length 3
  Bottom Layer w0.3: U1.47 14.89,40.48 R1.1
NetR2_1: R2.1 U1.48 | length 3.3
  Bottom Layer w0.3: U1.48 15.89,39.702 R2.1
NetR3_1: R3.1 U1.45 | length 3
  Bottom Layer w0.3: U1.45 12.89,40.385 R3.1
NetR4_1: R4.1 U1.36 | length 12.9
  Bottom Layer w0.3: U1.36 4.159,33.941 3.81,34.29 3.81,36.703 7.683,40.577 R4.1
NetR20_1: R20.1 U4.3 U4.5 U4.6 U4.8 | length 6.2
  Top Layer w0.4: U4.6 v3(41.276,64.575)
  Bottom Layer w0.4: v3(41.276,65.875) v3(41.276,64.575) v3(41.276,62.625) 42.179,61.722 R20.1
NetR20_2: R20.2 U4.11 | length 3.8
  Bottom Layer w0.3: R20.2@44.895,61.722 45.974,61.722 47.176,62.924 v3(47.176,63.925)
NetR38_1: R38.1 STM32F405RG.60 | length 2.8
  Top Layer w0.3: STM32F405RG.60 v3@47.343,34.135
  other v3: 47.372,34.177
OS1: P5.8 STM32F405RG.41 | length 13.2
  Top Layer w0.3: P5.8 34.629,20 39.239,24.61 STM32F405RG.41
OS2: P5.6 STM32F405RG.40 | length 12.8
  Top Layer w0.3: P5.6 31.538,21.082 35.052,21.082 38.739,24.769 STM32F405RG.40
OS3: P5.4 STM32F405RG.39 | length 12.3
  Top Layer w0.3: P5.4 32.935,22.225 35.56,22.225 38.239,24.904 STM32F405RG.39
PB1: STM32F405RG.27
PB7: STM32F405RG.59
PB8: STM32F405RG.61
PB9: STM32F405RG.62
PC14: C29.2 STM32F405RG.3 Y1.4 | length 11.3
  Top Layer w0.3: STM32F405RG.3 41.739,40.977 42.672,41.91 45.085,41.91 v3@46.228,43.053
  Bottom Layer w0.3: v3(46.229,43.067) 47.044,43.881 C29.2
PC15: C30.2 STM32F405RG.4 Y1.1 | length 8.1
  Top Layer w0.3: STM32F405RG.4 41.239,41.366 v3@42.926,43.053
  Bottom Layer w0.3: C30.2 42.468,43.067 v3(42.927,43.067)
PH0: C31.2 R44.1 STM32F405RG.5 Y2.1 | length 23.1
  Top Layer w0.254: v1(34.163,49.657) 37.338,49.657 40.739,46.256 STM32F405RG.5
  Bottom Layer w0.254: R44.1 C31.2 32.639,45.403 32.639,48.133 v1(34.163,49.657)
PH1: C32.2 R44.2 STM32F405RG.6 Y2.3 | length 17.6
  Top Layer w0.254: v3(38.101,47.258) 38.594,47.258 40.239,45.613 STM32F405RG.6
  Bottom Layer w0.254: R44.2 36.512,43.561 C32.2 38.101,45.15 v3(38.101,47.258)
RESET: C3.2 C27.1 R5.1 R35.1 RESET.1 STM32F405RG.7 SW.1 | length 79.7
  Top Layer w0.3: v2@8.128,43.434 10.868,43.434 10.874,43.429 23.773,43.429 v1(23.842,43.498) ; v1(35.052,33.02) 39.243,33.02 39.739,33.516 STM32F405RG.7
  Top Layer w0.6: v2(8.221,43.498) 6.477,45.242 6.477,63.851 v2(8.856,66.231)
  Bottom Layer w0.3: v1@23.749,43.561 25.111,42.199 25.111,40.421 32.512,33.02 v1@35.179,33.02
  Bottom Layer w0.6: SW.1 8.085,43.561 R5.1 C3.2 ; RESET.1 8.911,65.257 10.477,63.691 R35.1 10.51,62.992 C27.1
RESET_N: R48.1 STM32F405RG.25 U1.51 | length 24.9
  Top Layer w0.3: v1(18.889,37.656) 18.889,38.701 19.304,39.116 v1(24.892,39.116) ; v1(30.861,31.623) 31.373,32.135 STM32F405RG.25 36.707,32.135 v1@36.957,32.385
  Bottom Layer w0.3: v1(24.892,39.116) 27.178,36.83 27.178,33.147 28.702,31.623 v1(30.861,31.623)
  other v1: 36.83,32.385
RX: P6.1 STM32F405RG.43 | length 36.9
  Top Layer w0.3: STM32F405RG.43 40.239,23.983 35.53,19.274 35.53,9.053 36.833,7.75 49.146,7.75 P6.1
SPI1_CLK: STM32F405RG.21 U1.18 | length 28.7
  Top Layer w0.3: v4@19.431,24.003 19.431,30.734 22.832,34.135 STM32F405RG.21
  Bottom Layer w0.3: v4(19.432,24.017) 19.432,20.065 20.556,18.941 U1.18
SPI1_CS: STM32F405RG.24 U1.17 | length 23
  Top Layer w0.3: v3@21.717,19.939 22.56,20.782 22.56,31.069 24.126,32.635 STM32F405RG.24
  other v3: 21.718,19.953
SPI1_INTR: STM32F405RG.20 U1.16 | length 27.2
  Top Layer w0.3: v1(21.591,20.969) v1@21.591,20.956 ; STM32F405RG.20 22.697,34.635 18.796,30.734 18.796,23.749 v1@21.59,20.955 ; v1@21.59,20.955 v1@21.591,20.956
SPI1_MISO: STM32F405RG.22 U1.14 | length 23
  Top Layer w0.3: v1(21.59,22.86) 20.066,24.384 20.066,30.765 22.936,33.635 STM32F405RG.22
SPI1_MOSI: STM32F405RG.23 U1.13 | length 19.8
  Top Layer w0.3: v1@21.59,24.003 21.59,31.242 23.483,33.135 STM32F405RG.23
  other v1: 21.591,24.017
SPI2_MISO: P4.2 STM32F405RG.10 | length 22.9
  Top Layer w0.3: P4.2 31.496,54.204 31.496,43.307 32.893,41.91 36.068,41.91 38.239,39.739 STM32F405RG.10
SPI2_MOSI: STM32F405RG.11
SPI2_SCK: P4.8 STM32F405RG.29 | length 25.8
  Top Layer w0.3: v1(26.416,36.576) 26.416,44.577 P4.8@29.839,48 ; v1@27.559,30.607 28.031,30.135 STM32F405RG.29
  Top Layer w0.6: P4.8@29.839,48 P4.8
  Bottom Layer w0.3: v1(26.416,36.576) 26.382,36.542 26.382,31.784 v1@27.686,30.48
  other v1: 27.525,30.544
SS_PW_SD: P5.5 STM32F405RG.35 | length 14.2
  Top Layer w0.3: v1(35.56,24.003) 35.604,24.003 36.239,24.638 STM32F405RG.35
  Bottom Layer w0.3: v1(24.985,22.543) 34.256,22.543 v1@35.575,23.861
TX: P6.2 STM32F405RG.42 | length 33.8
  Top Layer w0.3: STM32F405RG.42 39.739,24.245 34.925,19.431 34.925,9.017 36.703,7.239 45.847,7.239 P6.2
VCC3V3: C1.2 C5.1 C18.2 C19.1 C28.2 C33.1 C35.1 C36.1 C39.2 D9.2 D10.2 FB2.1 L1.1 P1.1 P1.3 P1.5 PW.1 PW.2 R5.2 R10.2 R13.2 R33.2 R35.2 R37.2 R40.2 R42.2 R45.1 R48.2 STM32F405RG.19 STM32F405RG.32 STM32F405RG.48 STM32F405RG.64 SW.5 U1.19 U1.33 U1.52 U5.3 | length 257
  Top Layer w0.3: 29.337,35.814 30.016,35.135 STM32F405RG.19 35.35,35.135 v3@36.83,33.655 ; STM32F405RG.32 33.391,28.633 38.018,28.633 v3(38.609,29.224) ; v1(38.574,32.322) 38.574,29.259 v3(38.609,29.224) ; v3@42.037,35.56 42.612,36.135 STM32F405RG.64 47.946,36.135 51.562,39.751 53.467,39.751 v1@54.991,41.275 ; v3@42.418,29.337 42.739,29.016 STM32F405RG.48 ; v3(42.419,29.351) 41.925,29.845 39.23,29.845 v3(38.609,29.224) ; 51.563,39.765 51.563,45.211 50.546,46.228 50.546,49.086 P1.5
  Top Layer w0.6: v1(5.173,30.925) 15.05,30.925 ; v2(8.094,53.404) 8.094,47.024 11.112,44.006 v1(14.952,44.006) ; U5.3 30.226,58.801 31.369,59.944 34.924,59.944 L1.1 ; v2(27.813,8.001) 24.257,8.001 21.521,10.737 21.521,17.808 v1(21.683,17.971) 15.05,24.604 15.05,30.925 ; v2@31.623,38.1 29.337,35.814 25.273,35.814 23.431,37.656 v1(19.905,37.656) 19.905,35.78 15.05,30.925 ; D10.2 36.613,9.588 R13.2 39.243,8.382 44.36,8.382 D9.2 46.762,9.488 R10.2 ; C18.2@41.752,55.626 PW.2 PW.1 P1.1@51.994,55.626 ; P1.5 P1.3 P1.1
  Bottom Layer w0.3: v1(5.173,30.925) U1.33 ; v3(36.831,33.669) 38.178,32.322 v1(38.574,32.322) C36.1 ; v3(52.01,51.883) 53.505,51.883 ; R33.2 53.505,48.454 53.505,51.883 ; R42.2 53.505,51.883
  Bottom Layer w0.6: FB2.1 v1(5.173,30.925) ; R35.2 9.08,54.716 ; R5.2 14.508,43.561 v1(14.952,44.006) C5.1 17.081,44.006 19.905,41.182 v1(19.905,37.656) ; R37.2 13.271,52.324 C1.2 8.086,53.721 9.08,54.716 ; v2(27.813,8.001) 35.052,8.001 v2(36.576,9.525) ; v2@30.353,58.928 27.94,56.515 10.88,56.515 9.08,54.716 ; v2(31.589,38.037) 35.59,42.037 R45.1 C33.1
  other v1: 54.957,41.339 41.529,55.849
  other v2: 39.37,55.88 30.319,58.865
  other v3: 42.038,35.574
VCC5V: C8.2 C9.2 C10.1 C20.2 C21.1 L2.1 U2.3 U3.3 U4.1 U4.2 U6.3 | length 131.7
  Top Layer w0.45: C9.2 U3.3@7.175,13.399 ; C10.1@38.993,66.525 U4.2 U4.1
  Top Layer w0.6: v2(1.397,14.224) 1.397,65.024 5.602,69.229 26.656,69.229 26.797,69.088 ; U6.3 24.036,66.327 26.797,69.088 ; L2.1 33.146,67.184 31.242,69.088 26.797,69.088 ; v2(33.782,65.151) 35.529,65.151 C20.2 37.334,64.866 C10.1
  Bottom Layer w0.6: v2(1.397,14.224) 2.159,13.462 ; v2(7.112,13.462) 2.159,13.462 ; v1(23.588,12.255) 22.382,11.049 4.572,11.049 2.159,13.462
VDDA: C34.2 R45.2 STM32F405RG.13 | length 10.5
  Top Layer w0.3: STM32F405RG.13 36.739,36.032 v3@37.465,35.306
  Bottom Layer w0.3: v3(37.466,35.32) 37.466,40.07 R45.2
VIN: C2.1 C4.2 C17.2 P4.1 P4.3 P4.5 P4.7 U5.1 U6.1 | length 52.3
  Top Layer w0.6: U5.1 21.209,56.261 v1(20.574,55.626) 19.685,54.737 16.256,54.737 C2.1 ; U6.1 21.544,62.611 v1(21.082,62.611) 19.812,61.341 14.478,61.341 C2.1 ; P4.7 P4.5 ; P4.1 P4.3 P4.5 ; C2.1 12.065,53.594 15.119,50.54 P4.5
pads on no net: P3.1 P3.2 STM32F405RG.1 STM32F405RG.26 STM32F405RG.36 STM32F405RG.57 STM32F405RG.58 SW.6 SW.7 U1.1 U1.2 U1.3 U1.4 U1.5 U1.6 U1.7 U1.8 U1.9 U1.10 U1.11 U1.12 U1.15 U1.20 U1.23 U1.24 U1.25 U1.26 U1.27 U1.28 U1.29 U1.30 U1.31 U1.32 U1.35 U1.37 U1.38 U1.39 U1.40 U1.41 U1.44 U1.46 U1.49 U1.50 U2.5 U3.5 U4.4 U4.10 U4.12 U4.13 U4.14 U4.17 U4.V U5.4 U6.4 Y1.2 Y1.3

## Keep-outs
Keep-Out Layer:
  lines w0.3: 0,0 0,70 60,70 60,0 0,0

## Silkscreen, mask and mechanical layers (free items; w line width, h text height)
Bottom Overlay:
  lines w0.254: 6.858,1.905 6.858,0.254 29.464,0.254 ; 14.351,0.254 14.351,1.905 ; 21.844,0.254 21.844,1.905 ; 29.464,0.221 29.464,1.872 ; 30.48,1.905 30.48,0.254 53.086,0.254 53.086,1.811 ; 38.1,0.287 38.1,1.684 ; 45.72,0.254 45.72,1.651
  text "3.3V" at 47.879,57.023 h1
  text "DGND" at 48.006,50.579 h1
  text "5" at 33.655,32.135 h25
  text "6" at 32.385,26.035 h20
  text "V1.20190106" at 57.404,22.606 h1 r90
  text "DGND" at 10.795,0.508 h1
  text "5V" at 13.335,0.508 h1
  text "CAN1H/L" at 21.336,0.508 h1
  text "CAN2H/L" at 29.083,0.508 h1
  text "DGND" at 36.322,0.508 h1
  text "DI2" at 41.148,0.508 h1
  text "DI1" at 44.704,0.508 h1
  text "TX" at 48.387,0.508 h1
  text "RX" at 52.197,0.508 h1

## Dimensions
0,0 to 0,70 on Mechanical 1
0,0 to 60,0 on Mechanical 1